# Altium PCB RevisedFinalPCB.PcbDoc
Units mil, origin at the board's own origin, x right, y up, seen from the top; angles counter-clockwise.
Board outline 5605 x 3375 mil, 2 copper layers (Top Layer, Bottom Layer); 52 components, 50 nets, 161 pads, 0 vias.
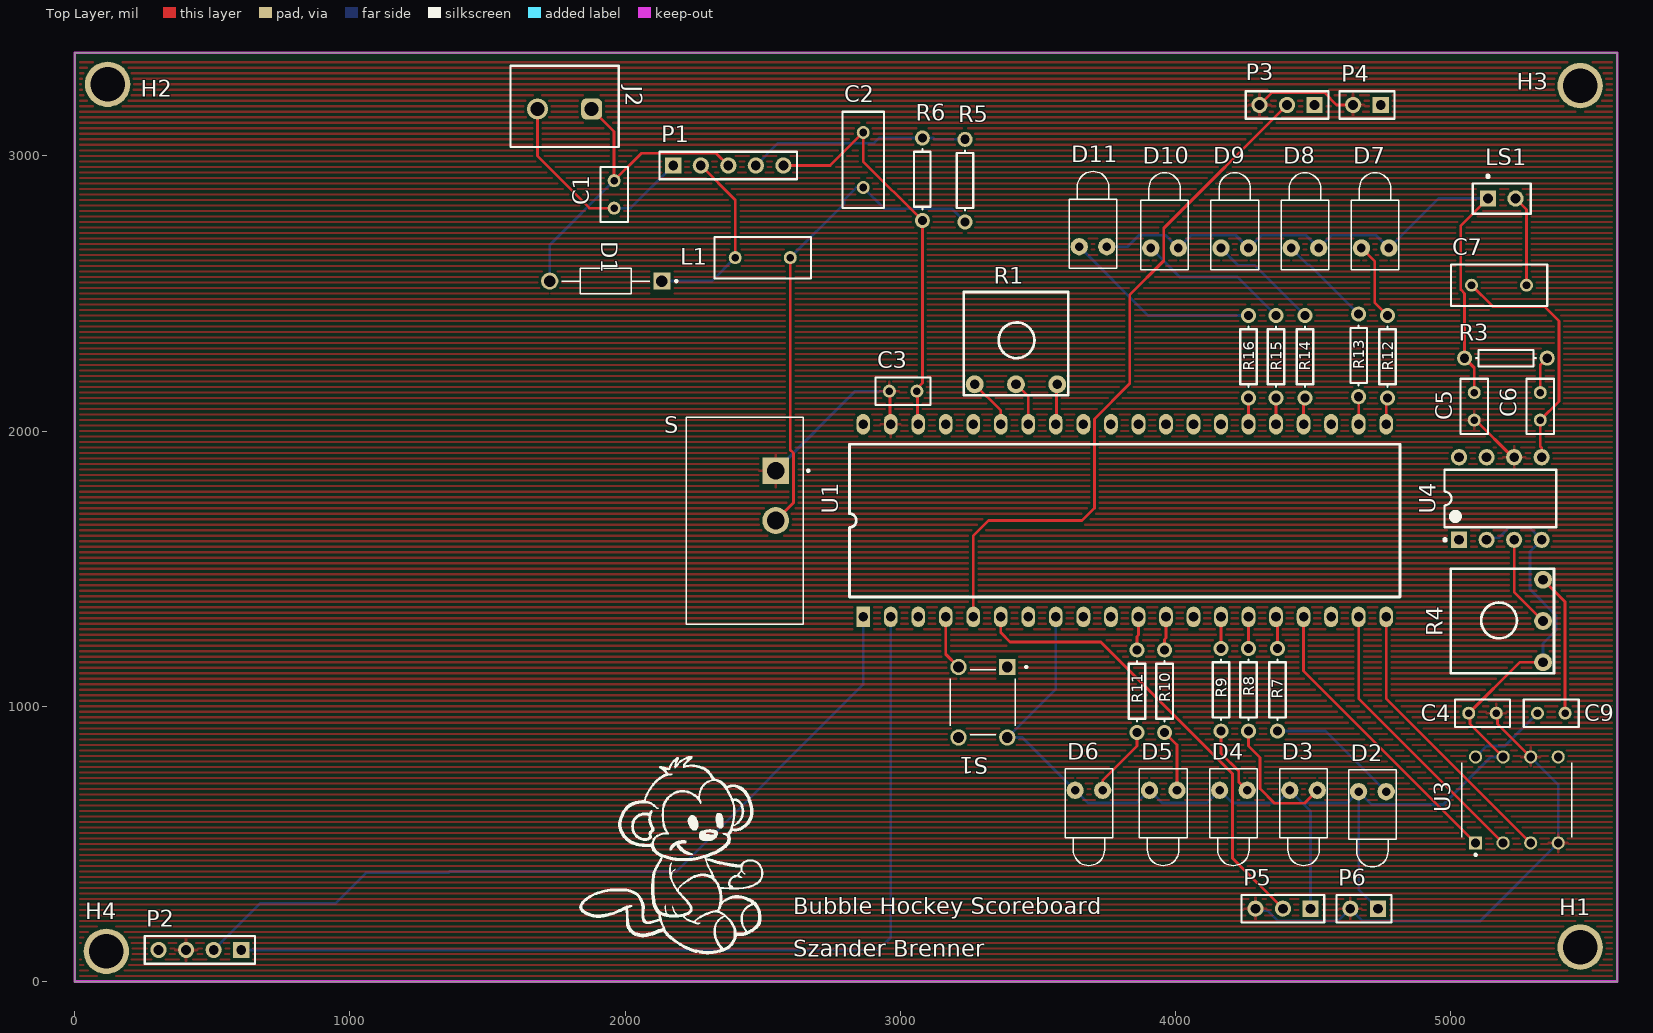
[diagram p0: Top Layer view]
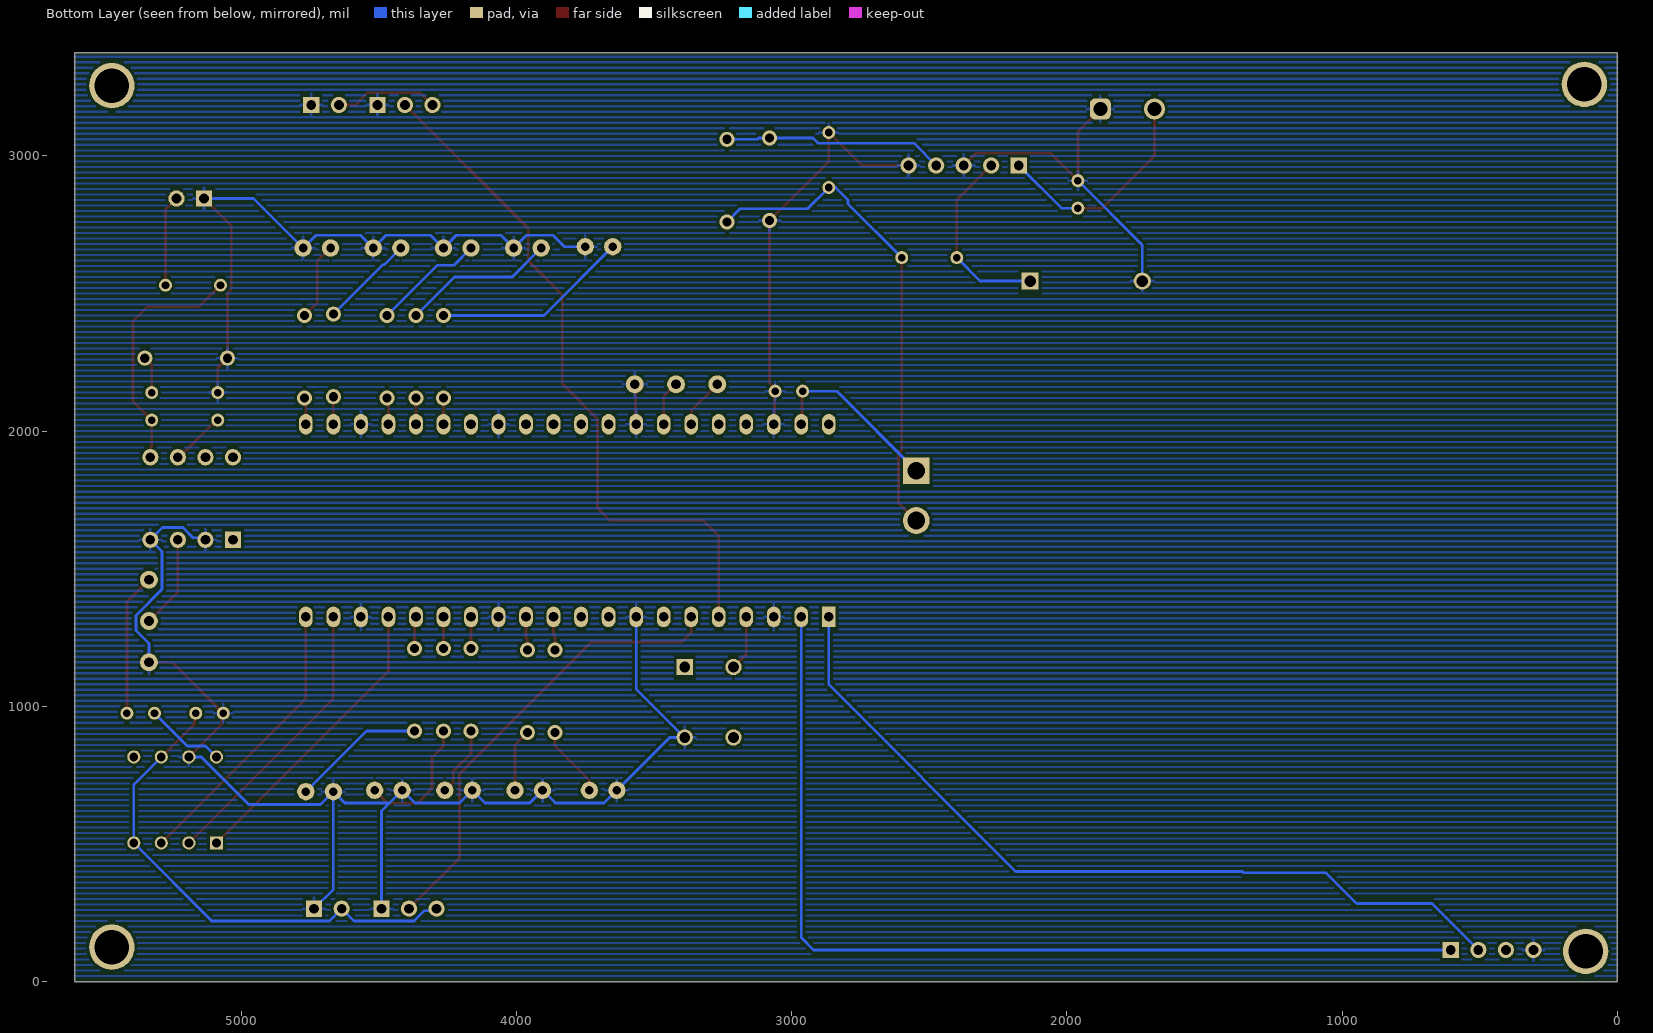
[diagram p1: Bottom Layer view, seen from below]

## Layer stack, top to bottom
Top Solder: solder mask 0.4, Solder Resist, Dk 3.5
Top Layer: signal copper 1.4
Dielectric 1: dielectric 12.6, FR-4, Dk 4.8
Bottom Layer: signal copper 1.4
Bottom Solder: solder mask 0.4, Solder Resist, Dk 3.5

## Board outline
0,0 0,3375 5605,3375 5605,0

## Design rules (kind name [scope] priority, off if disabled: settings)
Clearance [All] p1: gap=10 ignorepadtopadclearanceinfootprint=FALSE
PolygonConnect [All] p1: connectstyle=Relief reliefconductorwidth=10 reliefentries=4 polygonreliefangle="90 Angle" airgapwidth=10
RoutingVias [All] p1: holewidth=28 width=50 viastyle="Through Hole" minholewidth=28 minwidth=50 maxholewidth=28 maxwidth=50
SolderMaskExpansion [All] p1: expansion=4 istentingtop=FALSE
SupplyNets "Schematic Supply Nets_1" [InNet('GND')] p1: voltage=0.000
SupplyNets "Schematic Supply Nets" [InNet('VCC')] p2: voltage=0.000
Width [All] p1: maxlimit=10 minlimit=10 preferedwidth=10
30 further rules are at their usual default settings.

## Components (designator, comment, footprint, x,y, rotation, side; value= is the part's Value field where it differs from the comment)
C1 "Cap" RAD-0.1 1960,2860 r90 top value=100uF
C2 "Cap" RAD-0.2 2865,2985 r270 top value=1000uF
C3 "Cap" RAD-0.1 3010,2145 r180 top value=10uF
C4 "Cap" RAD-0.1 5115,975 r180 top value=0.1u
C5 "Cap" RAD-0.1 5085,2090 r90 top value=0.1u
C6 "Cap" RAD-0.1 5325,2090 r90 top value=0.05u
C7 "Cap" RAD-0.2 5175,2530 r0 top value=250u
C9 "Cap" RAD-0.1 5365,975 r180 top value=1u
D1 "1N5819" DIOAD1036W78L470D235 1930,2545 r180 top
D2 "LED1" LED-1 4715,690 r270 top
D3 "LED1" LED-1 4465,695 r270 top
D4 "LED1" LED-1 4210,695 r270 top
D5 "LED1" LED-1 3955,695 r270 top
D6 "LED1" LED-1 3685,695 r270 top
D7 "LED1" LED-1 4725,2665 r90 top
D8 "LED1" LED-1 4470,2665 r90 top
D9 "LED1" LED-1 4215,2665 r90 top
D10 "LED1" LED-1 3960,2665 r90 top
D11 "LED1" LED-1 3700,2670 r90 top
H1 "Hole 125mil" "Hole 125mil" 5470,125 r0 top
H2 "Hole 125mil" "Hole 125mil" 120,3260 r0 top
H3 "Hole 125mil" "Hole 125mil" 5470,3255 r0 top
H4 "Hole 125mil" "Hole 125mil" 115,110 r0 top
J2 "691137710002" 691137710002 1780,3180 r180 top
L1 "Inductor" RAD-0.2 2500,2630 r0 top value=100uH
LS1 "Speaker" PIN2 5135,2845 r0 top
P1 "Header 5" HDR1X5 2175,2965 r0 top
P2 "Header 4" HDR1X4 605,115 r180 top
P3 "Header 3" HDR1X3 4505,3185 r180 top
P4 "Header 2H" HDR1X2 4745,3185 r180 top
P5 "Header 3" HDR1X3 4490,265 r180 top
P6 "Header 2H" HDR1X2 4735,265 r180 top
R1 "RPot_1" "POT inline wide" 3320,2170 r0 top value=10K
R3 "Res1" AXIAL-0.3 5200,2265 r180 top value=10
R4 "RPot_1" "POT inline wide" 5335,1210 r90 top value=10K
R5 "Res1" AXIAL-0.3 3235,2910 r270 top value=3k
R6 "Res1" AXIAL-0.3 3080,2915 r90 top value=1k
R7 "Res1" AXIAL-0.3 4370,1060 r270 top value=1K
R8 "Res1" AXIAL-0.3 4265,1060 r270 top value=1K
R9 "Res1" AXIAL-0.3 4165,1060 r270 top value=1K
R10 "Res1" AXIAL-0.3 3960,1055 r270 top value=1K
R11 "Res1" AXIAL-0.3 3860,1055 r270 top value=1K
R12 "Res1" AXIAL-0.3 4770,2270 r90 top value=1K
R13 "Res1" AXIAL-0.3 4665,2275 r90 top value=1K
R14 "Res1" AXIAL-0.3 4470,2270 r90 top value=1K
R15 "Res1" AXIAL-0.3 4365,2270 r90 top value=1K
R16 "Res1" AXIAL-0.3 4265,2270 r90 top value=1K
S "L101011MS02Q" SW_L101011MS02Q 2435,1675 r270 top
S1 "TS02-66-43-BK-100-LCR-D" SW_TS02-66-43-BK-100-LCR-D 3300,1015 r270 top
U1 "Raspberry Pi Pico" "Raspberry Pi Pico" 2865,1325 r90 top
U3 "LTC1661CN8#PBF" DIP794W45P254L1016H393Q8 5240,660 r90 top
U4 "LM386N-1" DIP-8 5180,1755 r90 top

## Footprints (in the part's own frame and the unit in brackets; to place one, negate y for a bottom-side part, rotate by r counter-clockwise, add the part's x,y. Pads: shape width x height; smd on the part's side, far side on the other; paste and mask are expansions set on the pad)
691137710002 [mm] "Horizontal Cable Entry with Pressure Clamp, pitch 5mm, 02p"
  rrect50% 1.95x1.95 hole 1.3: 1(-2.5,0.25)
  round 1.95 hole 1.3: 2(2.5,0.25)
  silkscreen extent -5,-3.75 5,3.75, body extent -5,-3.75 5,3.75, height 11.6
AXIAL-0.3 [mm] "Axial Device, Thru-Hole; 2 Leads; 0.3 in Pin Spacing"
  round 1.4 hole 0.85: 1(-3.81,0) 2(3.81,0)
  silkscreen extent -2.77,-0.76 2.77,0.76
DIOAD1036W78L470D235 [mm]
  round 1.59 hole 1.06: A(5.18,0)
  rect 1.59x1.59 / inner round 1.59 / far side rect 1.59x1.59 hole 1.06: C(-5.18,0)
  silkscreen extent -6.6,-1.18 4.07,1.18, body extent -5.55,-1.4 5.55,1.4, height 2.8
DIP794W45P254L1016H393Q8 [mm]
  rect 1.22x1.22 hole 0.81: 1(-3.97,3.81)
  round 1.22 hole 0.81: 2(-3.97,1.27) 3(-3.97,-1.27) 4(-3.97,-3.81) 5(3.97,-3.81) 6(3.97,-1.27) 7(3.97,1.27) 8(3.97,3.81)
  silkscreen extent -5.17,-5.08 3.43,5.08
DIP-8 [mm]
  rect 1.5x1.5 hole 0.9: 1(-3.81,3.81)
  round 1.5 hole 0.9: 2(-3.81,1.27) 3(-3.81,-1.27) 4(-3.81,-3.81) 5(3.81,-3.81) 6(3.81,-1.27) 7(3.81,1.27) 8(3.81,3.81)
  silkscreen extent -3.93,-5.15 2.65,5.23, body extent -3.6,-5.15 3.6,5.15, height 5.08
HDR1X2 [mm] "Connector; Header; 2 Position"
  rect 1.5x1.5 hole 0.9: 1(0,0)
  round 1.5 hole 0.9: 2(2.54,0)
  silkscreen extent -1.27,-1.27 3.81,1.27
HDR1X3 [mm] "Connector; Header; 3 Position"
  rect 1.5x1.5 hole 0.9: 1(0,0)
  round 1.5 hole 0.9: 2(2.54,0) 3(5.08,0)
  silkscreen extent -1.27,-1.27 6.35,1.27
HDR1X4 [mm] "Connector; Header; 4 Position"
  rect 1.5x1.5 hole 0.9: 1(0,0)
  round 1.5 hole 0.9: 2(2.54,0) 3(5.08,0) 4(7.62,0)
  silkscreen extent -1.27,-1.27 8.89,1.27
HDR1X5 [mm] "Connector; Header; 5 Position"
  rect 1.5x1.5 hole 0.9: 1(0,0)
  round 1.5 hole 0.9: 2(2.54,0) 3(5.08,0) 4(7.62,0) 5(10.16,0)
  silkscreen extent -1.27,-1.27 11.43,1.27
"Hole 125mil" [mil]
  round 165 hole 125: 1(0,0)
LED-1 [mm] "LED; 2 Leads"
  round 1.6 hole 0.8: 1(0,1.27) 2(0,-1.27)
  silkscreen extent -2,-2.2 6.95,2.2
PIN2 [mm] "Photosensitive Diode; 2 Leads"
  rect 1.5x1.5 hole 0.9: 1(0,0)
  round 1.5 hole 0.9: 2(2.54,0)
  silkscreen extent -1.4,-1.4 3.94,2.17
"POT inline wide" [mil]
  round 65 hole 35: 1(-50,0) 2(100,0) 3(250,0)
  silkscreen extent -90,-40 290,335
RAD-0.1 [mm] "Radial Cap, Thru-Hole; 2 Leads; 0.1 in Pin Spacing"
  round 1.2 hole 0.7: 1(-1.27,0) 2(1.27,0)
  silkscreen extent -2.54,-1.27 2.54,1.27
RAD-0.2 [mm] "Radial Cap, Thru-Hole; 2 Leads; 0.2 in Pin Spacing"
  round 1.2 hole 0.7: 1(-2.54,0) 2(2.54,0)
  silkscreen extent -4.44,-1.91 4.44,1.9
"Raspberry Pi Pico" [mil]
  rect 75x50 hole 35: 1(0,0)
  oval 75x50 hole 35: 2(0,-100) 3(0,-200) 4(0,-300) 5(0,-400) 6(0,-500) 7(0,-600) 8(0,-700) 9(0,-800) 10(0,-900) 11(0,-1000) 12(0,-1100) 13(0,-1200) 14(0,-1300) 15(0,-1400) 16(0,-1500) 17(0,-1600) 18(0,-1700) 19(0,-1800) 20(0,-1900) 21(700,-1900) 22(700,-1800) 23(700,-1700) 24(700,-1600) 25(700,-1500) 26(700,-1400) 27(700,-1300) 28(700,-1200) 29(700,-1100) 30(700,-1000) 31(700,-900) 32(700,-800) 33(700,-700) 34(700,-600) 35(700,-500) 36(700,-400) 37(700,-300) 38(700,-200) 39(700,-100) 40(700,0)
  silkscreen extent 72,-1950 628,50
SW_L101011MS02Q [mm]
  rect 2.48x2.48 hole 1.65: 1(-4.6,2.85)
  round 2.48 hole 1.65: 2(0,2.85)
  silkscreen extent -9.55,-5.4 9.55,5.95
SW_TS02-66-43-BK-100-LCR-D [mm]
  rect 1.508x1.508 / inner round 1.508 / far side rect 1.508x1.508 hole 1: 1(-3.25,2.25)
  round 1.508 hole 1: 2(3.25,2.25) 3(-3.25,-2.25) 4(3.25,-2.25)
  silkscreen extent -3.35,-3 3,4.1, body extent -3.95,-3 3.95,3, height 4.3

## Part data
C1 C2 C3 C4 C5 C6 C7 C9: "Capacitor", LatestRevisionDate=17-Jul-2002, LatestRevisionNote="Re-released for DXP Platform.", PackageDescription="Radial Cap, Thru-Hole; 2 Leads; 0.3 in Pin Spacing", PackageReference=RAD-0.3, Published=8-Jun-2000, Publisher="Altium Limited"
D1: "1A, 40V, Planar Schottky", Package="DO-41-2 Taiwan Semiconductor", Check_prices=https://www.snapeda.com/parts/1N5819/taiwan/view-part/?ref=eda, MF="Taiwan Semiconductor", MP=1N5819, SnapEDA_Link=https://www.snapeda.com/parts/1N5819/taiwan/view-part/?ref=snap
D2 D3 D4 D5 D6 D7 D8 D9 D10 D11: "Typical RED GaAs LED", LatestRevisionDate=08-Jul-2005, LatestRevisionNote="Mech Layer 1 removed.", PackageDescription="LED; 2 Leads", PackageReference=LED-1, Published=8-Jun-2000, Publisher="Altium Limited"
J2: "WR-TBL Series 1377 Horizontal Entry, THT, pitch 5mm, 2p", Manufacturer="Wurth Elektronik", Operating Temperature Max=120°C, Operating Temperature Min=-30°C, Rated Current=16A, Working Voltage=300V, Application="Pressure Clamp", Category="Terminal Blocks", ComponentLink1Description="Website Link", ComponentLink1URL=https://www.we-online.com/redexpert/article/691137710002?ad, ComponentLink2Description="Datasheet Link", ComponentLink2URL=https://www.we-online.com/redexpert/spec/691137710002?ad, Manufacturer Part Number=691137710002, Match Code=WR-TBL, Modularity=No, Mount="Through Hole", Number of Pins=2, Number of Rows=1, Orientation=Horizontal, Packaging=Box, Pitch=5mm
LS1: "Loudspeaker", LatestRevisionDate=17-Jul-2002, LatestRevisionNote="Re-released for DXP Platform.", PackageReference=PIN2, Published=24-Mar-1999, Publisher="Altium Limited"
P1: "Header, 5-Pin", LatestRevisionDate=17-Jul-2002, LatestRevisionNote="Re-released for DXP Platform.", Publisher="Altium Limited"
P2: "Header, 4-Pin", LatestRevisionDate=17-Jul-2002, LatestRevisionNote="Re-released for DXP Platform.", Publisher="Altium Limited"
P3 P5: "Header, 3-Pin", LatestRevisionDate=17-Jul-2002, LatestRevisionNote="Re-released for DXP Platform.", Publisher="Altium Limited"
P4 P6: "Header, 2-Pin, Right Angle", LatestRevisionDate=17-Jul-2002, LatestRevisionNote="Re-released for DXP Platform.", Publisher="Altium Limited"
R1 R4: library part RPot_3, "Potentiometer", LatestRevisionDate=17-Jul-2002, LatestRevisionNote="Re-released for DXP Platform.", PackageDescription="Variable Resistor, Thru-Hole; 3 Leads", PackageReference=VR5, Published=8-Jun-2000, Publisher="Altium Limited", Set Position=0.5, Sim Note="Enter the Resistance value and the set point into parameter fields."
R3 R5 R6 R7 R8 R9 R10 R11 R12 R13 R14 R15 R16: "Resistor", LatestRevisionDate=17-Jul-2002, LatestRevisionNote="Re-released for DXP Platform.", PackageDescription="Axial Device, Thru-Hole; 2 Leads; 0.3 in Pin Spacing", PackageReference=AXIAL-0.3, Published=8-Jun-2000, Publisher="Altium Limited"
S: "Slide Switch SPST Through Hole", Package=None, Availability=Unavailable, MF=C&K, MP=L101011MS02Q, Price=None, SnapEDA_Link=https://www.snapeda.com/parts/L101011MS02Q/C%26K/view-part/455586/?ref=snap
S1: "6 x 6 mm, 4.3 mm Actuator Height, 100 gf, Black, Long Crimped, Through Hole, SPST, Tactile Switch", Package=None, Check_prices=https://www.snapeda.com/parts/TS02-66-43-BK-100-LCR-D/Same+Sky/view-part/?ref=eda, MF="Same Sky", MP=TS02-66-43-BK-100-LCR-D, SnapEDA_Link=https://www.snapeda.com/parts/TS02-66-43-BK-100-LCR-D/Same+Sky/view-part/?ref=snap
U3: "10 Bit Digital to Analog Converter 2 8-PDIP", Package="PDIP -8 Analog Devices", Availability=Warning, BuyPart=https://www.snapeda.com/parts/LTC1661CN8%23PBF/Analog%20Devices/view-part/4346247/?ref=eda, DigiKey-Purchase-URL=https://snapeda.com/shop?store=DigiKey&id=4346247, MF="Analog Devices", Mouser-Purchase-URL=https://snapeda.com/shop?store=Mouser&id=4346247, MP=LTC1661CN8#PBF, Price=None, SnapEDA_Link=https://www.snapeda.com/parts/LTC1661CN8%23PBF/Analog%20Devices/view-part/4346247/?ref=snap
U4: "Low-Voltage Audio Power Amplifier", PackageDocument=Sep-1997, DatasheetDocument=Sep-1997, PackageReference=N08E, Published=15-Apr-2002, Publisher="Altium Limited"
L1: Code_IEC=1005, Code_JEITA=0402, LatestRevisionDate=29-May-2009, LatestRevisionNote="IPC-7351 Footprint Added.", PackageDescription="Chip Inductor", PackageReference=0402-A, Published=8-Jun-2000, Publisher="Altium Limited"

## Nets (pads, with @x,y where several pads share a name; then routed paths per layer and width w, separated by ;. In a path a pad name is that pad's centre, name@x,y a point inside that pad or via, vN(x,y) a via of type N, cw(c..) or ccw(c..) an arc to the next point about the centre after c; other vN are vias at no path point)
ADC: R1.2 U1.34 | length 163.6
  Top Layer w10: R1.2 3465,2125 U1.34
ADC_REF: R1.1 U1.35 | length 184.4
  Top Layer w10: R1.1 3365,2075 U1.35
BeamBreak_Pin: P3.2 U1.5 | length 2531.4
  Top Layer w10: U1.5 3265,1620 3320,1675 3660,1675 3705,1720 3705,2044 3833,2172 3833,2495 3957,2619 3957,2737 P3.2
BeamBreak_Pin2: P5.2 U1.6 | length 1677.6
  Top Layer w10: U1.6 3365,1267.44 3398.44,1234 3728,1234 4207,755 4207,448 P5.2
CS: U1.17 U3.1 | length 1080.2
  Top Layer w10: U1.17 4465,1128.7 U3.1
feedback: P1.4 R5.1 R6.2 | length 803.5
  Bottom Layer w10: P1.4 2556,3046 2904,3046 2923,3065 R6.2 3120,3065 3125,3060 R5.1
GND: C1.2 C2.1 C3.1 C4.2 C5.2 D1.A D2.2 D3.2 D4.2 D5.2 D6.2 D7.2 D8.2 D9.2 D10.2 D11.2 J2.1 LS1.1 P1.3 P1.5 P2.4 P3.1 P4.1 P5.1 P6.1 R1.3 R3.2 R4.1 R6.1 S1.2 U1.3 U1.8 U1.13 U1.18 U1.23 U1.28 U1.33 U1.38 U3.7 U4.2 U4.4 | length 10054
  Top Layer w10: J2.1 1960,3088.58 C1.2 2059.53,3009.53 2330.47,3009.53 P1.3 ; P1.5 2745,2965 C2.1 2865,2980 R6.1 3080,2175.08 3060,2155.08 C3.1 3062.5,2142.5 3062.5,2027.5 U1.38 ; U1.33 3567.5,2027.5 3567.5,2167.5 R1.3 ; C5.2 5085,2230 R3.2 5050,2500.38 5036.38,2514 5036.38,2746.38 LS1.1 ; U3.7 5069.92,936.38 5069.92,970.08 C4.2 5250,1160 R4.1
  Bottom Layer w10: D1.A 1726.06,2676.06 C1.2 ; U1.8 3565,1063.47 S1.2 3442.95,887.05 D6.2 3681.5,648.5 3858.5,648.5 D5.2 3951.5,648.5 4113.5,648.5 D4.2 4206.5,648.5 4368.5,648.5 D3.2 4461.5,648.5 ; D11.2 3826.05,2670 3867.55,2711.5 3963.5,2711.5 D10.2 4056.5,2711.5 4218.5,2711.5 D9.2 4311.5,2711.5 4473.5,2711.5 D8.2 4566.5,2711.5 4728.5,2711.5 D7.2 4955,2845 LS1.1 ; P5.1 4490,620 4461.5,648.5 ; P6.1 4665,335 D2.2 ; U4.2 5137.5,1612.5 5174.53,1612.5 5211.56,1649.53 5285.47,1649.53 U4.4 5287.5,1562.5 5287.5,1425.35 5382.5,1330.35 5382.5,1276.03 5335,1228.53 R4.1 ; U3.7 5145.18,816.3 4972.38,643.5 4711.5,643.5 D2.2 ; 4461.5,648.5 4623.5,648.5 D2.2
LED0: R7.1 U1.16 | length 120
  Top Layer w10: U1.16 4365,1313 4370,1313 R7.1
LED1: R8.1 U1.15 | length 115
  Top Layer w10: R8.1 U1.15
LED2: R9.1 U1.14 | length 115
  Top Layer w10: R9.1 U1.14
LED3: R10.1 U1.12 | length 122.1
  Top Layer w10: R10.1 3960,1243 3965,1248 U1.12
LED4: R11.1 U1.11 | length 122.1
  Top Layer w10: R11.1 3860,1254 3865,1259 U1.11
LED5: R12.1 U1.21 | length 97.1
  Top Layer w10: U1.21 4765,2115 R12.1
LED6: R13.1 U1.22 | length 100
  Top Layer w10: U1.22 R13.1
LED7: R14.1 U1.24 | length 97.1
  Top Layer w10: U1.24 4465,2115 R14.1
LED8: R15.1 U1.25 | length 95
  Top Layer w10: U1.25 R15.1
LED9: R16.1 U1.26 | length 95
  Top Layer w10: U1.26 R16.1
MOSI: U1.20 U3.3 | length 1038.8
  Top Layer w10: U1.20 4765,1028.7 U3.3
NetC6_1: C6.1 C7.1 U4.5 | length 897.1
  Top Layer w10: C7.1 5153,2452 5341,2452 5393,2400 5393,2108 C6.1 5325,1944 5330,1939 U4.5
NetC6_2: C6.2 R3.1 | length 135.4
  Top Layer w10: C6.2 5325,2240 R3.1
NetC7_2: C7.2 LS1.2 | length 331.6
  Top Layer w10: LS1.2 5275,2805 C7.2
NetC9_1: C9.1 R4.3 | length 518.1
  Top Layer w10: R4.3 5415,1380 C9.1
NetC9_2: C9.2 U3.8 | length 290.7
  Bottom Layer w10: U3.8 5129.7,856 5196,856 C9.2
NetD2_1: D2.1 R7.2 | length 486.1
  Bottom Layer w10: R7.2 4545,910 D2.1
NetD3_1: D3.1 R8.2 | length 475.8
  Top Layer w10: R8.2 4265,856 4307,814 4307,701 4360,648 4468,648 D3.1
NetD4_1: D4.1 R9.2 | length 254.4
  Top Layer w10: R9.2 4165,828.76 4229.38,764.38 4229.38,725.62 D4.1
NetD5_1: D5.1 R10.2 | length 228.6
  Top Layer w10: R10.2 4005,860 D5.1
NetD6_1: D6.1 R11.2 | length 261.8
  Top Layer w10: D6.1 3735,731 3860,856 R11.2
NetD7_1: D7.1 R12.2 | length 284.4
  Top Layer w10: D7.1 4724,2616 4724,2466 R12.2
NetD8_1: D8.1 R13.2 | length 344.4
  Bottom Layer w10: D8.1 4481,2604 4486,2604 R13.2
NetD9_1: D9.1 R14.2 | length 406.5
  Bottom Layer w10: D9.1 4227.78,2602.22 4287.78,2602.22 R14.2
NetD10_1: D10.1 R15.2 | length 556.5
  Bottom Layer w10: D10.1 4015,2560 4225,2560 R15.2
NetD11_1: D11.1 R16.2 | length 718.6
  Bottom Layer w10: D11.1 3900,2420 R16.2
NetDS1_3: 
NetDS1_4: 
NetDS1_5: 
NetDS1_6: 
NetDS1_7: 
NetDS1_8: 
NetDS1_9: 
NetDS1_10: 
NetR4_2: R4.2 U4.3 | length 338.5
  Top Layer w10: U4.3 5230,1415 R4.2
NetS1_3: S1.3 U1.4 | length 201.3
  Top Layer w10: U1.4 3165,1189.37 S1.3
PWR_IN: C2.2 L1.2 R5.2 S.2 | length 1788
  Top Layer w10: S.2 2612,1739.8 2612,1920 2600,1932 L1.2
  Bottom Layer w10: L1.2 2795,2825 2795,2840 2840,2885 C2.2 2942,2808 3187,2808 R5.2
SCK: U1.19 U3.2 | length 1038.8
  Top Layer w10: U1.19 4665,1028.7 U3.2
SCL: P2.1 U1.2 | length 3543.6
  Bottom Layer w10: P2.1 2920,115 2965,160 U1.2
SDA: P2.2 U1.1 | length 3005.3
  Bottom Layer w10: P2.2 674,284 948,284 1059,395 1358,395 1363,400 2186,400 2865,1079 U1.1
VCC: C3.2 C4.1 C5.1 P2.3 P3.3 P4.2 P5.3 P6.2 S.1 U1.39 U3.4 U3.6 U4.6 | length 3069.5
  Top Layer w10: C3.2 2962.5,2142.5 2962.5,2027.5 U1.39 ; P3.3 4349.53,3229.53 4540.74,3229.53 4585.27,3185 P4.2 ; C5.1 5090,2040 5225,1905 U4.6 ; C4.1 5169.92,970.08 5169.92,936.38 U3.6
  Bottom Layer w10: S.1 2836.1,2145 C3.2 ; P5.3 4297.5,257.5 4334.53,257.5 4371.56,220.47 4590.47,220.47 P6.2 4679.53,220.47 5106.77,220.47 U3.4 5390,716.3 U3.6
Vin: C1.1 J2.2 P1.1 | length 806.8
  Top Layer w10: J2.2 1681.57,2999.43 1871,2810 C1.1
  Bottom Layer w10: C1.1 2020,2810 P1.1
Vout_reg: D1.C L1.1 P1.2 | length 688
  Top Layer w10: P1.2 2400,2840 L1.1
  Bottom Layer w10: D1.C 2315,2545 L1.1
pads on no net: H1.1 H2.1 H3.1 H4.1 S1.1 S1.4 U1.7 U1.9 U1.10 U1.27 U1.29 U1.30 U1.31 U1.32 U1.36 U1.37 U1.40 U3.5 U4.1 U4.7 U4.8

## Polygon pours and split planes (outlines as drawn)
GND on Bottom Layer "GND_L02_P001" (hatched Horizontal grid 20 track 8, pour order 1): 0,3375 0,0 5605,0 5605,3370
VCC on Top Layer "VCC_L01_P000" (hatched Horizontal grid 20 track 8, pour order 0): 0,0 5605,0 5605,3375 0,3375

## Keep-outs
Top Layer:
  the board outline again, w10

## Silkscreen, mask and mechanical layers (free items; w line width, h text height)
Top Overlay:
  drawing of 6 lines, arcs and shapes, not listed
  text "Bubble Hockey Scoreboard" at 2610,244.99 h60
  text "Szander Brenner" at 2610,90 h60